# Altium PCB Controller.PcbDoc (part 2 of 2)
Units mil, origin at the board's own origin, x right, y up, seen from the top; angles counter-clockwise.
Board outline 1500 x 3000 mil, 2 copper layers (Top Layer, Bottom Layer); 44 components, 27 nets, 191 pads, 283 vias.
Unrouted connection lines stored in the file: 1.
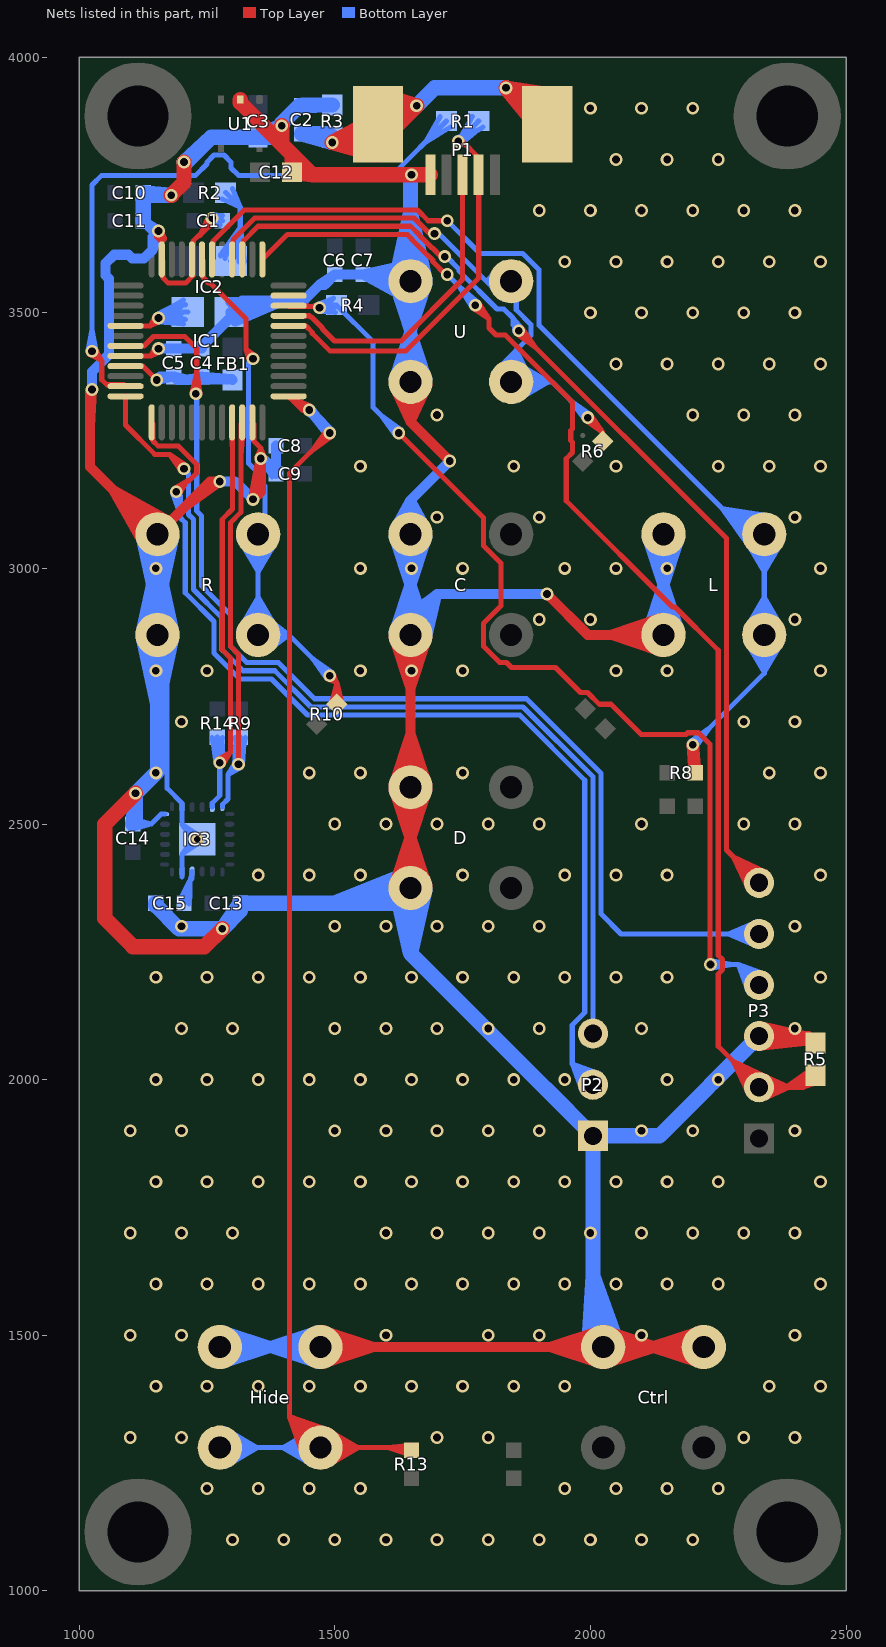
[diagram p2: the nets of this part, all layers, seen from the top]

## Via types
v1: diameter 25, hole 15, Top Layer to Bottom Layer, tented both sides, 214 vias
v2: diameter 25, hole 15, Top Layer to Bottom Layer, 68 vias
v3: diameter 25.98, hole 12.99, Top Layer to Bottom Layer, tented top, 1 vias

## Nets (pads, with @x,y where several pads share a name; then routed paths per layer and width w, separated by ;. In a path a pad name is that pad's centre, name@x,y a point inside that pad or via, vN(x,y) a via of type N, cw(c..) or ccw(c..) an arc to the next point about the centre after c; other vN are vias at no path point) (continued)
GND: C1.1 C2.2 C3.2 C4.2 C5.2 C6.2 C7.2 C8.2 C9.2 C10.2 C11.2 C12.2 C13.1 C14.2 C15.2 C.2 Ctrl.2 D.2 Hide.2 IC1.8 IC1.23 IC1.35 IC1.44 IC1.47 IC2.2 IC3.11 IC3.18 IC3.20 IC3.25 L.2 P1.5 P2.1 P3.3 R3.2 R5.2 R.2 U1.2 U.2 | length 27266.8
  Top Layer w10: IC1.8@1090.55,3415.47 1140.47,3415.47 ; IC1.8@1120.08,3415.47 1140.47,3415.47 ; v2@1148.82,3434.25 1140.47,3415.47 ; v2@1159.25,3423.82 1140.47,3415.47 ; IC1.47@1161.42,3604.45 1164.2,3601.67 1164.2,3567.92 ; v2@1253.51,3688.76 1235.88,3650.88 ; v2@1265.71,3680.14 1235.88,3650.88 ; IC1.23@1338.58,3285.55 1341.36,3282.77 1341.36,3249.02 ; v2@1347.63,3216.38 1355,3235.38 ; v2(1355,3215) 1355,3235.38 ; v2@1362.37,3216.38 1355,3235.38 ; 1140.47,3415.47 v2(1155,3430) 1140.47,3415.47 ; 1164.2,3567.92 1161.42,3574.92 1164.2,3567.92 ; 1164.2,3567.92 1174.1,3558.01 1207.79,3558.01 1223.25,3573.48 1223.25,3640.98 ; 1223.25,3640.98 1220.47,3633.98 1223.25,3640.98 ; 1223.25,3640.98 1233.16,3650.88 1235.88,3650.88 ; 1235.88,3650.88 v2(1260,3685) 1260,3675 1235.88,3650.88 ; 1341.36,3249.02 1338.58,3256.02 1341.36,3249.02 ; 1341.36,3249.02 1355,3235.38
  Top Layer w20: 1021,3276.74 v2(1025,3350) 1021,3346 1021,3199 R.2@1153.15,3066.85 1256.3,3170 ; R.2@1126.59,3046.76 1067.42,3152.58 ; R.2@1143.24,3057.97 1067.42,3152.58 ; R.2@1162.03,3076.76 1067.42,3152.58 ; R.2@1173.24,3093.41 1067.42,3152.58 ; 1208.95,3122.65 v2(1275,3170) ; v2@1355,3212.79 v2(1340,3135) ; v2(1355,3215) 1355,3150 ; 1415.53,3810.53 1416.5,3809.55 C12.2@1416.5,3775 ; Hide.2@1471.85,1476.85 Ctrl.2@2025,1476.85 Ctrl.2@2221.85,1476.85 2118.54,1476.85 ; Hide.2@1472.71,1463.57 1575.16,1476.85 ; Hide.2@1472.71,1490.13 1575.16,1476.85 ; Hide.2@1477.22,1443.98 1575.16,1476.85 ; Hide.2@1477.22,1509.72 1575.16,1476.85 ; D.2@1615.28,2380.37 1648.15,2478.31 ; D.2@1615.28,2566.48 1648.15,2468.54 ; D.2@1615.28,2577.22 1648.15,2675.16 ; C.2@1615.28,2864.63 1648.15,2766.69 ; U.2@1615.61,3357.9 1648.15,3286.85 ; D.2@1634.87,2375.86 1648.15,2478.31 ; D.2@1634.87,2570.99 1648.15,2468.54 ; D.2@1634.87,2572.71 1648.15,2675.16 ; C.2@1634.87,2869.14 1648.15,2766.69 ; U.2@1634.89,3363.87 1648.15,3286.85 ; D.2@1648.15,2375 D.2@1648.15,2571.85 C.2@1648.15,2870 ; U.2@1661.41,3363.87 1648.15,3286.85 ; D.2@1661.43,2375.86 1648.15,2478.31 ; D.2@1661.43,2570.99 1648.15,2468.54 ; D.2@1661.43,2572.71 1648.15,2675.16 ; C.2@1661.43,2869.14 1648.15,2766.69 ; 1670.07,3264.93 v2(1725,3210) 1648.15,3286.85 ; U.2@1680.69,3357.9 1648.15,3286.85 ; D.2@1681.02,2380.37 1648.15,2478.31 ; D.2@1681.02,2566.48 1648.15,2468.54 ; D.2@1681.02,2577.22 1648.15,2675.16 ; C.2@1681.02,2864.63 1648.15,2766.69 ; v2(1915,2950) 1995,2870 L.2@2143.15,2870 ; Ctrl.2@2019.63,1443.98 1921.69,1476.85 ; Ctrl.2@2019.63,1509.72 1921.69,1476.85 ; Ctrl.2@2024.14,1463.57 1921.69,1476.85 ; Ctrl.2@2024.14,1490.13 1921.69,1476.85 ; Ctrl.2@2025.86,1463.57 2128.31,1476.85 ; Ctrl.2@2025.86,1490.13 2128.31,1476.85 ; Ctrl.2@2030.37,1443.98 2128.31,1476.85 ; Ctrl.2@2030.37,1509.72 2128.31,1476.85 ; L.2@2137.78,2837.13 2039.84,2870 ; L.2@2137.78,2902.87 2039.84,2870 ; L.2@2142.29,2856.72 2039.84,2870 ; L.2@2142.29,2883.28 2039.84,2870 ; Ctrl.2@2216.48,1443.98 2118.54,1476.85 ; Ctrl.2@2216.48,1509.72 2118.54,1476.85 ; Ctrl.2@2220.99,1463.57 2118.54,1476.85 ; Ctrl.2@2220.99,1490.13 2118.54,1476.85 ; P3.3@2330.04,2065.47 2419.75,2075.42 ; P3.3@2332.13,2065.59 2419.53,2085 P3.3@2332.13,2104.41 ; P3.3@2334.16,2104.08 2419.75,2075.42 ; P3.3@2353.8,2085 R5.2@2440,2072.48 ; R5.2@2440,2071.5 2426.5,2085 P3.3@2330,2085 2419.75,2075.42 ; 1256.3,3170 v2(1275,3170) ; 1256.3,3170 v2(1275,3170) ; v2(1340,3135) 1355,3150 ; v2(1340,3135) 1355,3150 ; 1648.15,3286.85 U.2@1648.15,3365 1648.15,3286.85 ; v2@1155,3651.69 1161.25,3645.43 v2(1155,3660) v2@1155,3651.69
  Top Layer w30: v2(1280,2295) 1245,2260 1105,2260 1050,2315 1050,2500 ; U1.2@1315,3917.13 1315,3911.05 1396.05,3830 ; 1415.53,3810.53 1396.05,3830 ; C12.2@1416.5,3775 1416.5,3809.55 1456.05,3770 ; C12.2@1417.48,3775 1456.05,3770 ; 1547.5,3770 v2(1650,3770) ; 1050,2500 v2(1110,2560) 1050,2500 ; 1205,3755 v2(1180,3730) 1181,3730 1181,3731 1205,3755 ; 1205,3755 v2(1205,3795) 1205,3755 ; 1396.05,3830 v2(1396.05,3866.05) 1396.05,3830 ; 1456.05,3770 v2(1650,3770) ; v2(1650,3770) P1.5@1687.01,3770 v2(1650,3770)
  Bottom Layer w10: C14.2@1105,2500 1140.83,2500 ; C14.2@1106.4,2490.1 1140.83,2500 ; C14.2@1106.4,2509.9 1140.83,2500 ; R.2@1119.12,2852.4 1172,2791.85 ; R.2@1127.23,2858.62 1172,2791.85 ; R.2@1135.96,2863.71 1172,2791.85 ; R.2@1145.19,2867.64 1172,2791.85 ; R.2@1161.32,2871.53 1172,2791.85 ; IC3.18@1167.8,2519.21 1160.04,2519.21 1140.83,2500 ; R.2@1171.32,2872.24 1172,2791.85 ; R.2@1181.41,2871.69 1172,2791.85 ; R.2@1191.46,2869.85 1172,2791.85 ; IC3.11@1201.26,2402.09 1201.26,2396.26 IC3.25@1201.26,2440.47 ; IC3.11@1201.26,2411.93 IC3.25@1201.26,2440.47 ; IC3.20@1201.26,2528.07 IC3.25@1201.26,2499.53 ; IC3.25@1224.62,2464.92 IC3.25@1201.26,2499.53 ; IC3.25@1224.62,2475.08 IC3.25@1201.26,2440.47 ; IC3.25@1235.87,2463.83 IC3.25@1201.26,2440.47 ; IC3.25@1235.87,2476.17 IC3.25@1201.26,2499.53 ; v2@1256.07,3678.61 C1.1@1275.29,3671.18 ; v2@1259.53,3692.49 C1.1@1280,3690 ; v2@1263.11,3678.18 C1.1@1280,3690 ; C1.1@1265.96,3689.56 C1.1@1275.29,3671.18 ; v2@1351.67,3208.28 C9.2@1391.19,3192.86 ; v2@1359.46,3221.03 C9.2@1391.19,3192.86 ; C9.2@1377.14,3178.81 v2(1355,3215) ; 1172,2791.85 R.2@1153.15,2870 1172,2851.15 1172,2570 1201.26,2540.74 IC3.25@1201.26,2499.53 ; IC3.25@1201.26,2440.47 v3(1230.79,2470) ; IC3.25@1201.26,2440.47 v3(1230.79,2470) ; IC3.25@1201.26,2499.53 v3(1230.79,2470) ; IC3.25@1201.26,2499.53 v3(1230.79,2470) ; v2(1260,3685) C1.1@1275,3685 ; v2(1260,3685) C1.1@1280,3680 ; v2(1260,3685) C1.1@1280,3680 ; v2(1260,3685) C1.1@1280,3690 ; v2(1260,3685) C1.1@1275.29,3671.18 ; v2(1260,3685) C1.1@1275,3685 ; C1.1@1275,3685 1261.88,3677.74 C1.1@1275,3685 ; C1.1@1275,3685 1261.88,3692.26 C1.1@1275,3685 ; C1.1@1275,3685 C1.1@1280,3680 ; C1.1@1280,3680 1259.53,3677.51 C1.1@1280,3680 ; C1.1@1280,3680 1263.11,3691.82 C1.1@1280,3680 ; v2(1355,3215) C9.2@1385,3185 ; v2(1355,3215) C9.2@1391.19,3192.86 ; v2(1355,3215) C9.2@1385,3185 ; C9.2@1385,3185 1350.19,3209.25 C9.2@1385,3185 ; C9.2@1385,3185 1360.75,3219.81 C9.2@1385,3185
  Bottom Layer w20: v2(1025,3350) 1025,3384.7 1058,3417.7 1058,3566.7 1051.5,3573.2 1051.5,3596.8 1068.19,3613.5 1096.19,3613.5 1103.19,3606.5 1126.81,3606.5 1143.5,3623.2 ; v2(1155,3430) C5.2@1185,3430 C4.2@1240,3430 1240,3434.48 1296.5,3490.97 IC2.2@1296.5,3501.38 1319.12,3524 1439,3524 1470,3555 ; Hide.2@1275,1476.85 Hide.2@1471.85,1476.85 1368.54,1476.85 ; v2(1275,3170) 1305,3170 ; Hide.2@1275.86,1463.57 1378.31,1476.85 ; Hide.2@1275.86,1490.13 1378.31,1476.85 ; Hide.2@1280.37,1443.98 1378.31,1476.85 ; Hide.2@1280.37,1509.72 1378.31,1476.85 ; IC2.2@1296,3520.75 1398.85,3524 ; IC2.2@1298.46,3501.38 1398.85,3524 ; IC2.2@1304.55,3482.82 1398.85,3524 ; Hide.2@1466.48,1443.98 1368.54,1476.85 ; Hide.2@1466.48,1509.72 1368.54,1476.85 ; Hide.2@1470.99,1463.57 1368.54,1476.85 ; Hide.2@1470.99,1490.13 1368.54,1476.85 ; C.2@1615.28,2875.37 1648.15,2973.31 ; C.2@1615.28,3061.48 1648.15,2963.54 ; U.2@1615.28,3370.37 1648.15,3468.31 ; U.2@1615.28,3556.48 1648.15,3458.54 ; C.2@1615.91,3075.22 1648.15,3133.15 ; C.2@1623.79,2892.72 1700,2950 ; C.2@1634.87,2870.86 1648.15,2973.31 ; C.2@1634.87,3065.99 1648.15,2963.54 ; U.2@1634.87,3365.86 1648.15,3468.31 ; U.2@1634.87,3560.99 1648.15,3458.54 ; C.2@1634.91,3068.19 1648.15,3133.15 ; C.2@1637.52,2878 1700,2950 ; U.2@1637.73,3530.22 C7.2@1555,3575 ; U.2@1645.36,3548.84 C7.2@1555,3575 ; U.2@1646.89,3595.13 C7.2@1555,3575 ; U.2@1648.15,3365 U.2@1648.15,3561.85 ; U.2@1649.07,3575.12 C7.2@1555,3575 ; v2@1650,3769.86 v2(1650,3770) ; C.2@1659.79,2863.56 1700,2950 ; C.2@1661.39,3068.19 1648.15,3133.15 ; C.2@1661.43,2870.86 1648.15,2973.31 ; C.2@1661.43,3065.99 1648.15,2963.54 ; U.2@1661.43,3365.86 1648.15,3468.31 ; U.2@1661.43,3560.99 1648.15,3458.54 ; C.2@1678.83,2857.05 1700,2950 ; C.2@1680.39,3075.22 1648.15,3133.15 ; C.2@1681.02,2875.37 1648.15,2973.31 ; C.2@1681.02,3061.48 1648.15,2963.54 ; U.2@1681.02,3370.37 1648.15,3468.31 ; U.2@1681.02,3556.48 1648.15,3458.54 ; v2(1725,3210) 1648.15,3133.15 ; v2(1915,2950) 1700,2950 ; L.2@2110.28,2875.37 2143.15,2973.31 ; L.2@2110.28,3061.48 2143.15,2963.54 ; L.2@2129.87,2870.86 2143.15,2973.31 ; L.2@2129.87,3065.99 2143.15,2963.54 ; L.2@2143.15,2870 L.2@2143.15,3066.85 2143.15,2963.54 ; L.2@2156.43,2870.86 2143.15,2973.31 ; L.2@2156.43,3065.99 2143.15,2963.54 ; L.2@2176.02,2875.37 2143.15,2973.31 ; L.2@2176.02,3061.48 2143.15,2963.54 ; C11.2@1125,3680 v2(1155,3660) ; C11.2@1125,3680 v2(1155,3660) ; C11.2@1125,3680 v2(1155,3660) ; C11.2@1125,3680 v2@1145,3660 ; C11.2@1125,3680 v2(1155,3660) ; C11.2@1125,3680 v2@1145,3660 ; 1143.5,3623.2 v2(1155,3660) ; 1143.5,3623.2 1143.5,3648.5 v2(1155,3660) ; v2@1145,3660 v2(1155,3660) ; 1305,3170 v2(1340,3135) 1305,3170 ; 1470,3555 C6.2@1500,3575 ; 1470,3555 1480,3555 ; 1480,3555 C6.2@1500,3575 ; 1480,3555 C6.2@1500,3575 ; 1480,3555 C6.2@1500,3575 ; C6.2@1500,3575 C7.2@1555,3575 ; C6.2@1500,3575 C7.2@1555,3575 ; C7.2@1555,3575 U.2@1648.15,3561.85 ; C7.2@1555,3575 1635,3575 U.2@1648.15,3561.85 ; C.2@1648.15,2870 1700,2950 ; C.2@1648.15,2870 1648.15,2973.31 ; C.2@1648.15,2870 C.2@1648.15,2898.15 ; C.2@1648.15,2898.15 1700,2950 ; C.2@1648.15,2898.15 C.2@1648.15,3066.85 1648.15,3133.15 ; C9.2@1385,3185 C8.2@1385,3240 C9.2@1385,3185
  Bottom Layer w30: v2@1110.15,2560 v1@1153.15,2603 ; R.2@1125,2866.99 1153.15,2736.69 R.2@1181.3,2866.99 ; R.2@1125,2873.01 1153.15,3003.31 R.2@1181.3,2873.01 ; R.2@1125,3063.84 1153.15,2933.54 R.2@1181.3,3063.84 ; C15.2@1150,2345 1150,2340.3 1195.3,2295 v2(1280,2295) ; R.2@1153.15,3066.85 R.2@1153.15,2870 v1@1153.15,2603 ; D.2@1620.02,2371.87 1648.15,2246.85 ; U.2@1620,3564.86 1648.15,3695.16 U.2@1676.3,3564.86 ; D.2@1640.02,2402.11 1498.85,2345 ; U.2@1648.15,3561.85 v2@1648.15,3767.88 ; D.2@1651.12,2346.85 1498.85,2345 ; D.2@1676.28,2371.87 1648.15,2246.85 ; 1911.83,1983.17 P2.1@2005,1890 ; Ctrl.2@1996.72,1475.67 2005,1616.24 ; Ctrl.2@2052.47,1483.67 2005,1616.24 ; 2236.83,1991.83 P3.3@2330,2085 2135,1890 P2.1@2005,1890 ; C14.2@1105,2500 v2(1110,2560) ; C14.2@1105,2500 v2(1110,2560) ; C14.2@1105,2500 1110,2505 v2(1110,2560) ; v2(1110,2560) v1@1153.15,2603 ; C10.2@1125,3735 v2(1180,3730) ; C10.2@1125,3735 C11.2@1125,3680 C10.2@1125,3735 ; C10.2@1125,3735 v2(1180,3730) ; C10.2@1125,3735 C10.2@1130,3730 ; C10.2@1130,3730 v2(1180,3730) ; C10.2@1130,3730 v2(1180,3730) ; 1258.5,3843.5 v2(1205,3795) 1210,3795 1258.5,3843.5 ; 1258.5,3843.5 C3.2@1350,3843.5 ; 1258.5,3843.5 C3.2@1350,3843.5 ; v2(1280,2295) C13.1@1315,2345 ; v2(1280,2295) 1315,2330 C13.1@1315,2345 ; C13.1@1315,2345 1618.15,2345 D.2@1648.15,2375 ; C3.2@1350,3843.5 1373.5,3843.5 ; C3.2@1350,3843.5 1373.5,3843.5 ; 1373.5,3843.5 v2(1396.05,3866.05) ; 1373.5,3843.5 v2(1396.05,3866.05) ; v2(1396.05,3866.05) 1350,3844.49 v2(1396.05,3866.05) ; v2(1396.05,3866.05) 1396.05,3870.75 1430.3,3905 C2.2@1435,3905 ; C2.2@1435,3905 R3.2@1495,3906.5 1436.5,3906.5 C2.2@1435,3905 ; 1498.85,2345 D.2@1648.15,2375 ; 1648.15,2246.85 D.2@1648.15,2375 ; 1648.15,2246.85 P2.1@2005,1890 ; 2005,1616.24 Ctrl.2@2025,1476.85 2005,1496.85 P2.1@2005,1890
  other v1: 1300,1100 1400,1100 1500,1100 1600,1100 1700,1100 1800,1100 1900,1100 2000,1100 2100,1100 2200,1100 1250,1200 1350,1200 1450,1200 1550,1200 1950,1200 2050,1200 2150,1200 2250,1200 1100,1300 1200,1300 1700,1300 1800,1300 2300,1300 2400,1300 1150,1400 1250,1400 1350,1400 1450,1400 1550,1400 1650,1400 1750,1400 1850,1400 1950,1400 2350,1400 2450,1400 1100,1500 1200,1500 1600,1500 1800,1500 1900,1500 2100,1500 2400,1500 1150,1600 1250,1600 1350,1600 1450,1600 1550,1600 1650,1600 1750,1600 1850,1600 1950,1600 2050,1600 2150,1600 2250,1600 2450,1600 1100,1700 1200,1700 1300,1700 1600,1700 1700,1700 1800,1700 1900,1700 2000,1700 2100,1700 2200,1700 2300,1700 2400,1700 1150,1800 1250,1800 1350,1800 1450,1800 1550,1800 1650,1800 1750,1800 1850,1800 1950,1800 2050,1800 2150,1800 2250,1800 2450,1800 1100,1900 1200,1900 1500,1900 1600,1900 1700,1900 1800,1900 1900,1900 2100,1900 2200,1900 2400,1900 1150,2000 1250,2000 1350,2000 1450,2000 1550,2000 1650,2000 1750,2000 1850,2000 1950,2000 2150,2000 2250,2000 1200,2100 1300,2100 1500,2100 1600,2100 1700,2100 1800,2100 1900,2100 2100,2100 2400,2100 1150,2200 1250,2200 1350,2200 1450,2200 1550,2200 1650,2200 1750,2200 1850,2200 1950,2200 2050,2200 2150,2200 2450,2200 1200,2300 1500,2300 1600,2300 1700,2300 1800,2300 1900,2300 2400,2300 1350,2400 1450,2400 1550,2400 1750,2400 1950,2400 2050,2400 2150,2400 2450,2400 1500,2500 1600,2500 1700,2500 1800,2500 1900,2500 2100,2500 2300,2500 2400,2500 1150,2600 1450,2600 1550,2600 1750,2600 2350,2600 2450,2600 1200,2700 2300,2700 2400,2700 1150,2800 1250,2800 1550,2800 1650,2800 1750,2800 2050,2800 2150,2800 2450,2800 1900,2900 2000,2900 2400,2900 1150,3000 1550,3000 1650,3000 1750,3000 1950,3000 2050,3000 2150,3000 2450,3000 1700,3100 1900,3100 2400,3100 1550,3200 1850,3200 2050,3200 2250,3200 2350,3200 2450,3200 1700,3300 2200,3300 2300,3300 2400,3300 2050,3400 2150,3400 2250,3400 2350,3400 2450,3400 2000,3500 2100,3500 2200,3500 2300,3500 2400,3500 1950,3600 2050,3600 2150,3600 2250,3600 2350,3600 2450,3600 1900,3700 2000,3700 2100,3700 2200,3700 2300,3700 2400,3700 2050,3800 2150,3800 2250,3800 2000,3900 2100,3900 2200,3900
HIDE: Hide.1 IC1.25 R13.2 | length 6063.6
  Top Layer w10: IC1.25@1409.45,3336.73 1436.18,3310 ; Hide.1@1439.41,1259.63 1411.07,1340.78 ; v2@1445.42,3304.06 IC1.25@1410.46,3335.72 ; Hide.1@1448.81,1263.55 1411.07,1340.78 ; v2@1453.58,3316.59 IC1.25@1410.46,3335.72 ; Hide.1@1457.6,1268.51 1411.07,1340.78 ; Hide.1@1465.7,1274.42 1411.07,1340.78 ; Hide.1@1472.32,1271.71 1545.16,1280 ; Hide.1@1472.32,1288.29 1545.16,1280 ; Hide.1@1474.14,1261.84 1545.16,1280 ; Hide.1@1474.14,1298.16 1545.16,1280 ; Hide.1@1477.32,1252.23 1545.16,1280 ; Hide.1@1477.32,1307.77 1545.16,1280 ; Hide.1@1477.43,1286.15 1411.07,1340.78 ; Hide.1@1481.86,1243.02 1545.16,1280 ; Hide.1@1481.86,1316.98 1545.16,1280 ; Hide.1@1483.34,1294.25 1411.07,1340.78 ; v2@1484.3,3269.87 1456.29,3231.29 ; Hide.1@1488.3,1303.04 1411.07,1340.78 ; Hide.1@1492.22,1312.44 1411.07,1340.78 ; v2@1494.87,3259.3 1456.29,3231.29 ; R13.2@1647.85,1265.23 1604,1280 ; R13.2@1650,1285 1604,1280 ; IC1.25@1410.46,3335.72 v2(1450,3310) ; 1411.07,1340.78 Hide.1@1471.85,1280 1645,1280 R13.2@1650,1275 1604,1280 ; 1411.07,1340.78 1411.07,3186.07 v2(1490,3265) 1456.29,3231.29 ; 1436.18,3310 v2(1450,3310) ; 1436.18,3310 1447.96,3317.22 1436.18,3310 ; 1436.18,3310 1447.96,3302.78 1436.18,3310 ; 1436.18,3310 v2(1450,3310)
  Bottom Layer w10: Hide.1@1275,1280 Hide.1@1471.85,1280 1398.54,1280 ; Hide.1@1275.47,1271.71 1348.31,1280 ; Hide.1@1275.47,1288.29 1348.31,1280 ; Hide.1@1277.29,1261.84 1348.31,1280 ; Hide.1@1277.29,1298.16 1348.31,1280 ; Hide.1@1280.47,1252.23 1348.31,1280 ; Hide.1@1280.47,1307.77 1348.31,1280 ; Hide.1@1285.01,1243.02 1348.31,1280 ; Hide.1@1285.01,1316.98 1348.31,1280 ; v2@1445.13,3304.3 1483.71,3276.29 v2@1455.7,3314.87 ; v2(1450,3310) 1490,3270 v2(1490,3265) ; Hide.1@1461.84,1243.02 1398.54,1280 ; Hide.1@1461.84,1316.98 1398.54,1280 ; Hide.1@1466.38,1252.23 1398.54,1280 ; Hide.1@1466.38,1307.77 1398.54,1280 ; Hide.1@1469.56,1261.84 1398.54,1280 ; Hide.1@1469.56,1298.16 1398.54,1280 ; Hide.1@1471.38,1271.71 1398.54,1280 ; Hide.1@1471.38,1288.29 1398.54,1280 ; v2@1483.46,3261.33 1464.56,3302.68 ; v2@1483.94,3260.58 1459.31,3300.69 ; v2@1484.52,3259.88 1454.4,3297.57 ; v2@1494.62,3270.91 1454.4,3297.57 ; v2@1495.28,3270.33 1459.31,3300.69 ; v2@1495.85,3269.7 1464.56,3302.68 ; 1454.4,3297.57 v2(1490,3265) ; 1459.31,3300.69 v2(1490,3265) ; 1464.56,3302.68 v2(1490,3265)
LEFT: IC1.42 L.1 R8.2 | length 5387.9
  Top Layer w10: IC1.42@1259.84,3604.45 1262.62,3607.23 1262.62,3640.98 ; v2(1720,3680) 1682.88,3680 1661.61,3701.27 1322.91,3701.27 1262.62,3640.98 ; v2@2192.5,2654.98 R8.2@2196.37,2612.5 ; v2@2192.53,2654.34 R8.2@2200,2612.5 ; v2@2192.61,2653.71 R8.2@2203.63,2612.5 ; v2@2192.94,2652.47 R8.2@2211.16,2612.79 ; R8.2@2195,2600 v2@2200,2645.64 ; v2@2207.39,2653.71 R8.2@2196.37,2612.5 ; v2@2207.39,2656.29 R8.2@2211.16,2612.79 ; v2@2207.47,2654.34 R8.2@2200,2612.5 ; v2@2207.5,2654.98 R8.2@2203.63,2612.5 ; R8.2@2214.76,2602.16 v2@2200,2645.64 ; 1262.62,3640.98 1259.84,3633.98 1262.62,3640.98 ; R8.2@2196.37,2612.5 v2(2200,2655) ; R8.2@2200,2612.5 v2(2200,2655) ; v2@2200,2645.64 R8.2@2205,2600 2200,2605 v2(2200,2655) ; v2(2200,2655) R8.2@2203.63,2612.5 ; v2(2200,2655) R8.2@2211.16,2612.79
  Bottom Layer w10: v2(1720,3680) 1783.84,3616.16 1867.49,3616.16 1899.31,3584.34 1899.31,3580.69 1899.5,3580.5 1899.5,3475.5 2308.15,3066.85 L.1@2340,3066.85 ; v2@2195.13,2660.7 2233.71,2688.71 v2@2205.7,2650.13 ; v2(2200,2655) 2340,2795 L.1@2340,2870 L.1@2340,3066.85 ; L.1@2303.02,2859.99 2340,2796.69 ; L.1@2303.02,2880.01 2340,2943.31 ; L.1@2303.02,3056.84 2340,2993.54 ; L.1@2312.23,2864.53 2340,2796.69 ; L.1@2312.23,2875.47 2340,2943.31 ; L.1@2312.23,3061.38 2340,2993.54 ; L.1@2313.89,3038.82 2257.4,3117.6 ; L.1@2321.82,3045.15 2257.4,3117.6 ; L.1@2321.84,2867.71 2340,2796.69 ; L.1@2321.84,2872.29 2340,2943.31 ; L.1@2321.84,3064.56 2340,2993.54 ; L.1@2328.99,3052.23 2257.4,3117.6 ; L.1@2331.71,2869.53 2340,2796.69 ; L.1@2331.71,2870.47 2340,2943.31 ; L.1@2331.71,3066.38 2340,2993.54 ; L.1@2335.35,3059.96 2257.4,3117.6 ; L.1@2344.04,3074.11 2257.4,3117.6 ; L.1@2348.07,3083.28 2257.4,3117.6 ; L.1@2348.29,2869.53 2340,2796.69 ; L.1@2348.29,2870.47 2340,2943.31 ; L.1@2348.29,3066.38 2340,2993.54 ; L.1@2351.14,3092.87 2257.4,3117.6 ; L.1@2353.21,3102.81 2257.4,3117.6 ; L.1@2358.16,2867.71 2340,2796.69 ; L.1@2358.16,2872.29 2340,2943.31 ; L.1@2358.16,3064.56 2340,2993.54 ; L.1@2367.77,2864.53 2340,2796.69 ; L.1@2367.77,2875.47 2340,2943.31 ; L.1@2367.77,3061.38 2340,2993.54 ; L.1@2376.98,2859.99 2340,2796.69 ; L.1@2376.98,2880.01 2340,2943.31 ; L.1@2376.98,3056.84 2340,2993.54 ; 2257.4,3117.6 L.1@2340,3066.85
NetC2_1: C2.1 P1.SHD R3.1 | length 1844.9
  Top Layer w30: P1.SHD@1574.61,3875.54 v2(1495,3833.22) ; P1.SHD@1581.77,3808.74 v2(1495,3833.22) ; P1.SHD@1584.65,3842.84 v2(1495,3833.22) ; P1.SHD@1893.17,3867.97 v2(1835,3940) ; P1.SHD@1915.35,3868.43 1906.57,3868.43 v2(1835,3940) ; P1.SHD@1915.35,3894.02 v2(1835,3940) ; P1.SHD@1926.57,3926.34 v2(1835,3940) ; v2(1495,3833.22) 1549.44,3833.22 P1.SHD@1584.65,3868.43 P1.SHD@1623.43,3868.43 ; P1.SHD@1623.43,3868.43 v2(1660,3905) ; P1.SHD@1623.43,3868.43 v2(1660,3905) ; v2(1660,3905) 1584.65,3894.02 v2(1660,3905) ; v2(1660,3905) 1597.06,3862.14 v2(1660,3905) ; v2(1660,3905) 1587.44,3928.11 v2(1660,3905)
  Bottom Layer w30: R3.1@1495,3844.49 C2.1@1435,3850 ; v2(1660,3905) 1695,3940 v2(1835,3940) ; C2.1@1435,3850 v2(1495,3833.22) ; C2.1@1435,3850 v2(1495,3833.22) ; C2.1@1435,3850 R3.1@1488.5,3850 ; R3.1@1488.5,3850 v2(1495,3833.22) ; R3.1@1488.5,3850 v2(1495,3833.22) ; R3.1@1488.5,3850 R3.1@1495,3843.5 v2(1495,3833.22)
NetC15_1: C15.1 IC3.10 | length 236.2
  Bottom Layer w10: C15.1@1195.67,2348.59 1216.5,2388.87 ; C15.1@1214.89,2343.55 1216.5,2388.87 ; IC3.10@1220.94,2407.01 1220.94,2393.32 ; 1216.5,2388.87 IC3.10@1220.94,2402.09 ; 1216.5,2388.87 C15.1@1205,2345 1216.5,2356.5 1216.5,2388.87 ; 1216.5,2388.87 1220.94,2393.32 ; 1220.94,2393.32 IC3.10@1220.94,2402.09 ; 1220.94,2393.32 IC3.10@1220.94,2402.09
NetIC1_5: IC1.5 IC2.3 | length 1346.8
  Top Layer w10: IC1.5@1090.55,3474.53 1139.53,3474.53 ; IC1.5@1120.08,3474.53 1139.53,3474.53 ; v2@1148.87,3494.32 1139.53,3474.53 ; v2@1159.32,3483.87 1139.53,3474.53 ; 1139.53,3474.53 v2(1155,3490) 1139.53,3474.53
  Bottom Layer w10: v2@1151.01,3496.35 IC2.3@1193.9,3518.88 ; v2@1152.09,3496.91 IC2.3@1199.86,3512.94 ; v2@1153.72,3482.61 IC2.3@1203.42,3477.83 ; v2@1155.2,3482.5 IC2.3@1206.2,3487.63 ; v2@1155.89,3497.45 IC2.3@1206.2,3487.63 ; v2@1157.18,3482.82 IC2.3@1205.34,3501.38 ; v2@1157.18,3482.83 IC2.3@1205.25,3501.38 ; v2@1157.37,3497.12 IC2.3@1203.42,3477.83 ; v2@1158.9,3483.59 IC2.3@1199.86,3512.94 ; v2@1159.92,3484.34 IC2.3@1193.9,3518.88 ; IC2.3@1203.42,3524.93 1166.38,3501.38 ; IC2.3@1207.87,3487.05 1166.38,3501.38 ; IC2.3@1207.87,3515.71 1166.38,3501.38 ; IC2.3@1210.28,3501.38 1166.38,3501.38 ; IC2.3@1212.24,3501.38 1166.38,3501.38 ; v2(1155,3490) IC2.3@1199.86,3512.94 ; v2(1155,3490) IC2.3@1193.9,3518.88 ; v2(1155,3490) IC2.3@1205.25,3501.38 ; v2(1155,3490) IC2.3@1206.2,3487.63 ; v2(1155,3490) IC2.3@1203.42,3477.83 ; v2(1155,3490) IC2.3@1205.34,3501.38 ; v2(1155,3490) 1166.38,3501.38 ; 1166.38,3501.38 IC2.3@1203.42,3477.83 ; IC2.3@1205.25,3501.38 1153.88,3497.42 IC2.3@1205.34,3501.38
NetIC2_1: IC2.1 R2.2 | length 611.1
  Bottom Layer w10: IC2.1@1276.15,3611.56 1315,3667.16 ; R2.2@1278.99,3723.02 1315,3706.5 ; IC2.1@1284.84,3606.41 1315,3667.16 ; R2.2@1286.5,3735 1315,3706.5 ; R2.2@1287.48,3735 1315,3706.5 ; IC2.1@1296.5,3601.38 1315,3619.88 1315,3706.5 ; IC2.1@1298.46,3601.38 1315,3667.16 ; R2.2@1299.75,3743.07 1315,3706.5 ; IC2.1@1312.85,3599.37 1315,3667.16 ; IC2.1@1322.94,3599.8 1315,3667.16
RIGHT: IC1.43 R10.2 R.1 | length 3039
  Top Layer w10: IC1.43@1240.16,3604.45 1242.94,3601.67 1242.94,3567.92 ; v2@1333.3,3406.63 1326.5,3428.5 ; v2@1345.25,3415.35 1326.5,3428.5 ; v2@1485.81,2783.78 1503.89,2776.11 ; v2(1490,2790) 1503.89,2776.11 ; R10.2@1493.96,2735.07 1503.89,2776.11 ; v2@1496.22,2794.19 1503.89,2776.11 ; R10.2@1503.89,2733.89 1503.89,2776.11 ; R10.2@1513.82,2735.07 1503.89,2776.11 ; 1242.94,3567.92 1240.16,3574.92 1242.94,3567.92 ; 1242.94,3567.92 1252.84,3558.01 1256.99,3558.01 1326.5,3488.5 1326.5,3428.5 ; 1326.5,3428.5 v2(1340,3410) 1340,3415 1326.5,3428.5
  Bottom Layer w10: R.1@1313.02,2880.01 1350,2943.31 ; R.1@1313.02,3056.84 1350,2993.54 ; R.1@1322.23,2875.47 1350,2943.31 ; R.1@1322.23,3061.38 1350,2993.54 ; R.1@1331.84,2872.29 1350,2943.31 ; R.1@1331.84,3064.56 1350,2993.54 ; v2(1340,3410) 1331.5,3401.5 1331.5,3205.27 1359,3177.77 1359,3165.44 1363.5,3160.94 1363.5,3080.35 R.1@1350,3066.85 R.1@1350,2870 1410,2870 ; R.1@1341.71,2870.47 1350,2943.31 ; R.1@1341.71,3066.38 1350,2993.54 ; R.1@1350.58,2861.71 1410,2870 ; R.1@1350.58,2878.29 1410,2870 ; R.1@1352.79,2851.91 1410,2870 ; R.1@1352.79,2888.09 1410,2870 ; R.1@1356.68,2842.49 1410,2870 ; R.1@1356.68,2897.51 1410,2870 ; R.1@1358.29,2870.47 1350,2943.31 ; R.1@1358.29,3066.38 1350,2993.54 ; R.1@1362.23,2833.7 1410,2870 ; R.1@1362.23,2906.3 1410,2870 ; R.1@1368.16,2872.29 1350,2943.31 ; R.1@1368.16,3064.56 1350,2993.54 ; R.1@1377.77,2875.47 1350,2943.31 ; R.1@1377.77,3061.38 1350,2993.54 ; R.1@1386.98,2880.01 1350,2943.31 ; R.1@1386.98,3056.84 1350,2993.54 ; v2@1484.3,2785.13 1456.29,2823.71 ; v2@1494.87,2795.7 1456.29,2823.71 ; 1410,2870 v2(1490,2790) 1456.29,2823.71
RSTIN: IC1.7 P3.5 | length 2579.2
  Top Layer w10: IC1.7@1090.55,3435.16 1126.92,3435.16 ; v2@1220.83,3342.46 1230,3384.08 ; v2@1235.76,3341.86 1230,3384.08 ; 1126.92,3435.16 1120.08,3435.16 1126.92,3435.16 ; 1126.92,3435.16 1145.27,3453.5 1206.5,3453.5 1230,3430 1230,3340 1228.5,3341.5 v2(1228.27,3341.5) 1230,3384.08
  Bottom Layer w10: v2(1228.27,3341.5) 1228.5,3341.5 1230,3340 1230,3112.06 1239.46,3102.6 1239.46,2965.54 1295.69,2909.31 1295.69,2847.51 1327.51,2815.69 1389.31,2815.69 1460,2745 1875,2745 2021,2599 2021,2324 2060,2285 P3.5@2330,2285 ; P3.5@2324.95,2261 2270.47,2285 ; P3.5@2324.95,2309 2270.47,2285 ; P3.5@2328.23,2270.58 2270.47,2285 ; P3.5@2328.23,2299.42 2270.47,2285
SCL: IC1.21 IC3.23 R14.1 | length 1413.1
  Top Layer w10: v2@1270.42,2625.94 1295.69,2640.69 ; v2(1275,2620) 1295.69,2640.69 ; v2@1280.94,2615.42 1295.69,2640.69 ; IC1.21@1299.21,3256.02 1299.92,3220.11 ; IC1.21@1299.21,3285.55 1299.92,3284.84 1299.92,3116.2 1279.69,3095.97 1279.69,2840.88 1295.69,2824.88 1295.69,2640.69
  Bottom Layer w10: R14.1@1260.06,2668.89 v2@1270,2625 ; IC3.23@1260.31,2532.99 1260.31,2540.74 1275,2555.43 v2(1275,2620) ; v2@1267.5,2619.78 R14.1@1270,2663.39 ; v2@1267.61,2621.28 R14.1@1278.78,2663.79 ; v2@1267.69,2618.34 R14.1@1261.7,2661.66 ; R14.1@1270,2670 v2@1270,2625 ; R14.1@1279.94,2668.89 v2@1270,2625 ; v2@1281.92,2622.89 R14.1@1261.7,2661.66 ; v2@1282.35,2621.5 R14.1@1270,2663.39 ; v2@1282.5,2619.99 R14.1@1278.78,2663.79 ; R14.1@1261.7,2661.66 v2(1275,2620) ; v2@1270,2625 v2(1275,2620) ; R14.1@1270,2663.39 v2(1275,2620) ; v2(1275,2620) R14.1@1278.78,2663.79
SDA: IC1.22 IC3.24 R9.1 | length 1615.9
  Top Layer w10: v2(1311.69,2616.69) 1311.69,2831.51 1295.69,2847.51 1295.69,3089.34 1316.12,3109.77 1316.12,3282.77 IC1.22@1318.9,3285.55 ; 1316.12,3220.04 IC1.22@1318.9,3256.02
  Bottom Layer w10: IC3.24@1280,2532.99 1280,2537.8 1291,2548.8 1291,2596 ; v2@1304.19,2616.52 R9.1@1306.95,2660.55 ; v2@1304.63,2619.21 R9.1@1322.55,2658.35 ; R9.1@1305.06,2668.89 v2@1315,2625 ; v2@1305.75,2621.27 1291,2596 ; v2@1316.27,2610.75 1291,2596 ; v2@1319.05,2618.13 R9.1@1306.95,2660.55 ; v2@1319.09,2615.44 R9.1@1322.55,2658.35 ; R9.1@1324.94,2668.89 v2@1315,2625 ; 1291,2596 v2(1311.69,2616.69) ; 1291,2596 v2(1311.69,2616.69) ; R9.1@1306.95,2660.55 v2(1311.69,2616.69) ; v2(1311.69,2616.69) R9.1@1315,2659.9 ; v2(1311.69,2616.69) R9.1@1322.55,2658.35 ; v2(1311.69,2616.69) R9.1@1315,2659.54 ; v2(1311.69,2616.69) 1315,2620 R9.1@1315,2670 v2@1315,2625 ; R9.1@1315,2659.54 1319.19,2616.77 R9.1@1315,2659.9 ; R9.1@1315,2659.54 1304.29,2617.92 R9.1@1315,2659.9
SWCLK: IC1.37 P3.2 R5.1 | length 3607.5
  Top Layer w10: IC1.37@1358.27,3604.45 1407.09,3653.27 1641.73,3653.27 1650.5,3644.5 1650.5,3643.64 1683.38,3610.75 1684.25,3610.75 1691.5,3603.5 1691.5,3600.27 1716.77,3575 v2(1720,3575) ; v2@1770.25,3509.19 1801.5,3488.5 ; v2(1775,3515) 1801.5,3488.5 ; v2@1780.81,3519.75 1801.5,3488.5 ; P3.2@2309.95,1970.88 2279.26,2035.74 ; P3.2@2318.74,1975.82 2279.26,2035.74 ; P3.2@2331.77,1970.58 2389.53,1985 ; P3.2@2331.77,1999.42 2389.53,1985 ; P3.2@2335.05,1961 2389.53,1985 ; P3.2@2335.05,2009 2389.53,1985 ; P3.2@2339.18,1996.26 2279.26,2035.74 ; P3.2@2344.12,2005.05 2279.26,2035.74 ; R5.1@2433.06,2020.46 2382.43,1985 ; R5.1@2440,2008.5 2416.5,1985 ; R5.1@2443.69,1993.31 2382.43,1985 ; 1801.5,3488.5 1801.5,3470.27 1815.27,3456.5 1833.5,3456.5 1965,3325 1965,3273.23 1961.5,3269.73 1961.5,3250.27 1965,3246.77 1965,3226.77 1952.79,3214.56 1952.79,3132.21 2160.69,2924.31 2165.64,2924.31 2250,2839.95 2250,2243.23 2258.5,2234.73 2258.5,2215.27 2250,2206.77 2250,2065 P3.2@2330,1985 ; 2279.26,2035.74 P3.2@2330,1985 ; P3.2@2330,1985 2416.5,1985 ; 2382.43,1985 R5.1@2440,2007.52 ; 2416.5,1985 R5.1@2440,2007.52 ; 2416.5,1985 2427.71,2015.56 2416.5,1985 ; 2416.5,1985 2447.51,1994.9 2416.5,1985 ; 2416.5,1985 R5.1@2440,2007.52
  Bottom Layer w10: v2(1720,3575) 1775,3520 v2(1775,3515) 1744.1,3550.9 ; v2@1768.95,3510.57 1744.1,3550.9 ; v2@1780.28,3520.33 1744.1,3550.9
SWDIO: IC1.34 P3.4 R4.2 | length 2762.6
  Top Layer w10: IC1.34@1409.45,3513.9 1410.76,3512.58 v2@1458.97,3512.58 ; IC1.34@1438.98,3513.9 v2@1458.97,3512.58 ; v2(1470,3510) 1466.1,3513.9 1460.28,3513.9 v2@1458.97,3512.58 ; v2(1625,3265) 1790.69,3099.31 1790.69,3044.36 1825,3010.05 1825,2926.8 1790.69,2892.49 1790.69,2847.51 1822.51,2815.69 1835.95,2815.69 1845.64,2806 1931.63,2806 1980.41,2757.21 1994.56,2757.21 2017.45,2734.32 2040.07,2734.32 2099.4,2675 2186.77,2675 2190.27,2678.5 2211.5,2678.5 2215,2675 2234,2656 2234,2225 v2(2235,2225)
  Bottom Layer w10: v2@1466.48,3516.62 R4.2@1497.11,3528.65 ; v2@1468.63,3502.63 R4.2@1501.46,3500.35 ; v2@1469.71,3517.49 R4.2@1502.52,3515 ; v2@1470.99,3502.57 R4.2@1498.5,3510 ; v2@1470.99,3517.43 R4.2@1498.5,3510 ; v2@1471.98,3502.77 R4.2@1502.52,3515 ; v2@1473,3516.87 R4.2@1501.46,3500.35 ; v2@1474.93,3504.35 R4.2@1497.11,3528.65 ; v2@1619.3,3260.13 1591.29,3298.71 v2@1629.87,3270.7 ; v2(1625,3265) 1575,3315 1575,3443.5 R4.2@1503.5,3515 R4.2@1498.5,3510 ; v2(2235,2225) 2290,2225 ; v2@2235.66,2217.53 2277.5,2225 v2@2235.66,2232.47 ; P3.4@2309.31,2171.83 2290,2225 ; P3.4@2318.49,2176.13 2290,2225 ; P3.4@2330,2185 2290,2225 ; P3.4@2338.87,2196.51 2290,2225 ; P3.4@2343.17,2205.69 2290,2225 ; v2(1470,3510) R4.2@1502.52,3515 ; v2(1470,3510) R4.2@1497.11,3528.65 ; v2(1470,3510) R4.2@1501.46,3500.35 ; v2(1470,3510) R4.2@1498.5,3510
SWO: IC1.39 P3.6 | length 2439.5
  Top Layer w10: IC1.39@1318.9,3604.45 1321.68,3607.23 1321.68,3640.98 ; v2(1715,3610) 1711.31,3606.31 1690.87,3626.75 1690.01,3626.75 1666.5,3650.27 1666.5,3651.13 1648.36,3669.27 1349.97,3669.27 1321.68,3640.98 ; v2@1855.13,3459.3 1893.71,3431.29 v2@1865.7,3469.87 ; v2(1860,3465) 2266,3059 2266,2449 P3.6@2330,2385 ; P3.6@2309.95,2370.88 2279.26,2435.74 ; P3.6@2318.74,2375.82 2279.26,2435.74 ; P3.6@2339.18,2396.26 2279.26,2435.74 ; P3.6@2344.12,2405.05 2279.26,2435.74 ; 1321.68,3640.98 1318.9,3633.98 1321.68,3640.98
  Bottom Layer w10: v2(1715,3610) 1718.23,3610 1743.5,3584.73 1743.5,3581.5 1817.46,3507.54 1830.69,3507.54 1848.5,3489.73 ; v2@1852.83,3462.8 1848.5,3489.73 ; v2@1866.3,3469.07 1848.5,3489.73 ; 1848.5,3489.73 v2(1860,3465) 1848.5,3476.5 1848.5,3489.73
UART_RX: IC1.13 P2.2 | length 2512.2
  Top Layer w10: IC1.13@1141.73,3285.55 1144.51,3282.77 1144.51,3249.02 ; v2@1185.39,3155.92 1211.5,3171.5 ; v2(1190,3150) 1211.5,3171.5 ; v2@1195.92,3145.39 1211.5,3171.5 ; 1144.51,3249.02 1141.73,3256.02 1144.51,3249.02 ; 1144.51,3249.02 1154.42,3239.12 1194.12,3239.12 1230,3203.23 1230,3186.77 1214.73,3171.5 1211.5,3171.5
  Bottom Layer w10: v2@1182.74,3148.11 1198,3104.46 ; v2@1197.47,3150.69 1198,3104.46 ; P2.2@1984.35,1976.77 1964.47,2030.53 ; P2.2@1993.51,1981.11 1964.47,2030.53 ; P2.2@2013.89,2001.49 1964.47,2030.53 ; P2.2@2018.23,2010.65 1964.47,2030.53 ; 1198,3104.46 v2(1190,3150) 1198,3142 1198,3098.8 1207.46,3089.34 1207.46,2952.29 1263.69,2896.05 1263.69,2834.25 1314.25,2783.69 1376.05,2783.69 1446.75,2713 1861.75,2713 1989,2585.75 1989,2131.31 1964.47,2106.79 1964.47,2030.53 ; 1964.47,2030.53 P2.2@2005,1990 1964.47,2030.53
UART_TX: IC1.12 P2.3 | length 2077.1
  Top Layer w10: 1090.55,3300.83 IC1.12@1090.55,3336.73 1090.55,3280.36 1147.79,3223.12 1176.88,3223.12 ; v2@1199.22,3190.22 1176.88,3223.12 ; v2@1209.78,3200.78 1176.88,3223.12 ; 1176.88,3223.12 v2(1205,3195) 1176.88,3223.12
  Bottom Layer w10: v2(1205,3195) 1214,3186 1214,3105.43 1223.46,3095.97 1223.46,2958.92 1279.69,2902.68 1279.69,2840.88 1320.88,2799.69 1382.68,2799.69 1453.37,2729 1868.37,2729 2005,2592.37 P2.3@2005,2090
UP: IC1.40 R6.2 U.1 | length 2988.8
  Top Layer w10: IC1.40@1299.21,3604.45 1301.99,3607.23 1301.99,3643.92 ; v2(1695,3655) 1685.25,3655 1654.99,3685.27 1343.34,3685.27 1301.99,3643.92 ; v2@1990.21,3289.23 R6.2@2023.89,3266.11 ; v2(1995,3295) R6.2@2023.89,3266.11 ; v2@2000.77,3299.79 R6.2@2023.89,3266.11 ; R6.2@2023.89,3248.89 R6.2@2023.89,3266.11 ; 1301.99,3643.92 1299.21,3633.98 1301.99,3643.92
  Bottom Layer w10: v2(1695,3655) 1703.23,3655 1796.38,3561.85 ; U.1@1810.87,3382.4 1855,3426.77 ; U.1@1818.8,3375.73 1855,3426.77 ; U.1@1827.55,3370.54 1855,3426.77 ; U.1@1829.91,3526.64 1796.38,3561.85 ; U.1@1829.91,3597.06 1796.38,3561.85 ; U.1@1836.76,3534.77 1796.38,3561.85 ; U.1@1836.76,3588.93 1796.38,3561.85 ; U.1@1836.91,3366.87 1855,3426.77 ; U.1@1841.55,3543.87 1796.38,3561.85 ; U.1@1841.55,3579.83 1796.38,3561.85 ; U.1@1844.29,3553.57 1796.38,3561.85 ; U.1@1844.29,3570.13 1796.38,3561.85 ; U.1@1845.47,3356.71 1918.31,3365 ; U.1@1845.47,3373.29 1918.31,3365 ; U.1@1847.29,3346.84 1918.31,3365 ; U.1@1847.29,3383.16 1918.31,3365 ; U.1@1850.47,3337.23 1918.31,3365 ; U.1@1850.47,3392.77 1918.31,3365 ; U.1@1853.27,3364.22 1855,3426.77 ; U.1@1855.01,3328.02 1918.31,3365 ; U.1@1855.01,3401.98 1918.31,3365 ; U.1@1863.31,3364.75 1855,3426.77 ; U.1@1873.24,3366.91 1855,3426.77 ; U.1@1882.87,3370.75 1855,3426.77 ; v2@1989.3,3290.13 1961.29,3328.71 ; v2@1999.87,3300.7 1961.29,3328.71 ; 1796.38,3561.85 U.1@1845,3561.85 ; 1796.38,3561.85 U.1@1845,3561.85 ; U.1@1845,3365 1855,3426.77 ; U.1@1845,3365 1925,3365 v2(1995,3295) 1961.29,3328.71 ; U.1@1845,3365 1855,3375 1855,3426.77 ; U.1@1845,3561.85 1878.15,3561.85 1855,3538.7 1855,3505.86 1883.5,3477.36 1883.5,3455.27 1855,3426.77
USBD_N: IC1.32 P1.2 R1.2 | length 1094.1
  Top Layer w10: IC1.32@1409.45,3474.21 1443.51,3474.21 1455.88,3461.84 1455.88,3460.05 1490.93,3425 1638.28,3425 1781.5,3568.21 P1.2@1781.5,3770 1781.5,3803.27 1749.77,3835 v2(1741.5,3835) ; 1781.5,3700.63 P1.2@1781.5,3740.47
  Bottom Layer w10: v2@1738.23,3841.75 1779.82,3857.67 v2@1745.85,3828.89 ; R1.2@1768.74,3883.78 v2(1741.5,3835) ; R1.2@1780.51,3875 v2(1741.5,3835) ; R1.2@1781.5,3875 v2(1741.5,3835) ; R1.2@1789.59,3863.45 v2(1741.5,3835)
USBD_P: IC1.33 P1.3 | length 667.6
  Top Layer w10: IC1.33@1409.45,3494.21 1450,3494.21 ; IC1.33@1438.98,3494.21 1450,3494.21 ; 1750,3700.63 P1.3@1750,3740.47 ; P1.3@1750,3770 1750,3565 1630,3445 1499.21,3445 1475.88,3468.33 1475.88,3470.13 1454.26,3491.75 1452.46,3491.75 1450,3494.21
USBPULLUP: IC1.11 R1.1 | length 1552.8
  Top Layer w10: v2@1020.48,3419.01 1044.12,3405.88 ; v2(1025,3425) 1044.12,3405.88 ; v2@1030.99,3429.52 1044.12,3405.88 ; IC1.11@1090.55,3356.42 1087.77,3359.2 1054.02,3359.2 ; 1044.12,3405.88 1044.12,3369.1 1054.02,3359.2 ; 1054.02,3359.2 1061.02,3356.42 1054.02,3359.2
  Bottom Layer w10: v2@1017.53,3425.66 1025,3467.5 v2@1032.47,3425.66 ; v2(1025,3425) 1025,3750 1044,3769 1227.82,3769 1250.01,3791.2 1250.01,3794.73 1263.78,3808.5 1283.25,3808.5 1297.01,3794.73 1297.01,3783.37 1311.38,3769 1612.5,3769 R1.1@1718.5,3875 ; R1.1@1705.78,3883.82 1677.61,3834.1 ; R1.1@1717.52,3875 1677.61,3834.1 ; R1.1@1726.62,3863.48 1677.61,3834.1
VDDACAPS: C4.1 C5.1 FB1.1 IC1.9 | length 424.9
  Top Layer w10: IC1.9@1090.55,3395.79 1124.3,3395.79 1151.5,3368.59 v2(1151.5,3368.5)
  Bottom Layer w20: FB1.1@1300,3368.5 FB1.1@1298.5,3370 ; C5.1@1185,3375 v2(1151.5,3368.5) 1157.99,3375 C5.1@1185,3375 ; C5.1@1185,3375 1214.97,3368.5 ; C5.1@1185,3375 1191.5,3368.5 1214.97,3368.5 ; 1214.97,3368.5 C4.1@1240,3375 ; 1214.97,3368.5 1216.46,3370 ; 1216.46,3370 C4.1@1240,3375 ; 1216.46,3370 C4.1@1240,3375 ; 1216.46,3370 FB1.1@1298.5,3370 ; C4.1@1240,3375 FB1.1@1298.5,3370
pads on no net: IC1.2 IC1.3 IC1.4 IC1.6 IC1.10 IC1.14 IC1.15 IC1.16 IC1.17 IC1.18 IC1.19 IC1.20 IC1.27 IC1.28 IC1.29 IC1.30 IC1.31 IC1.38 IC3.2 IC3.3 IC3.4 IC3.5 IC3.6 IC3.7 IC3.9 IC3.14 IC3.15 IC3.16 IC3.17 IC3.19 IC3.21 IC3.22 P1.4 U1.4

## Polygon pours and split planes (outlines as drawn)
GND on Top Layer "TopGND" (solid, remove dead copper, pour order 4): 1000,4000 1000,1000 2500,1000 2500,4000
GND on Bottom Layer "BotGND" (solid, remove dead copper, pour order 2): 1000,4000 1000,1000 2500,1000 2500,4000

## Keep-outs
Keep-Out Layer:
  the board outline again, w10